# Altium PCB Boost Convertor V1 PCB.PcbDoc
Units mm, origin at the board's own origin, x right, y up, seen from the top; angles counter-clockwise.
Board outline 33.1 x 32.2 mm, 2 copper layers (Top Layer, Bottom Layer); 10 components, 7 nets, 26 pads, 0 vias.
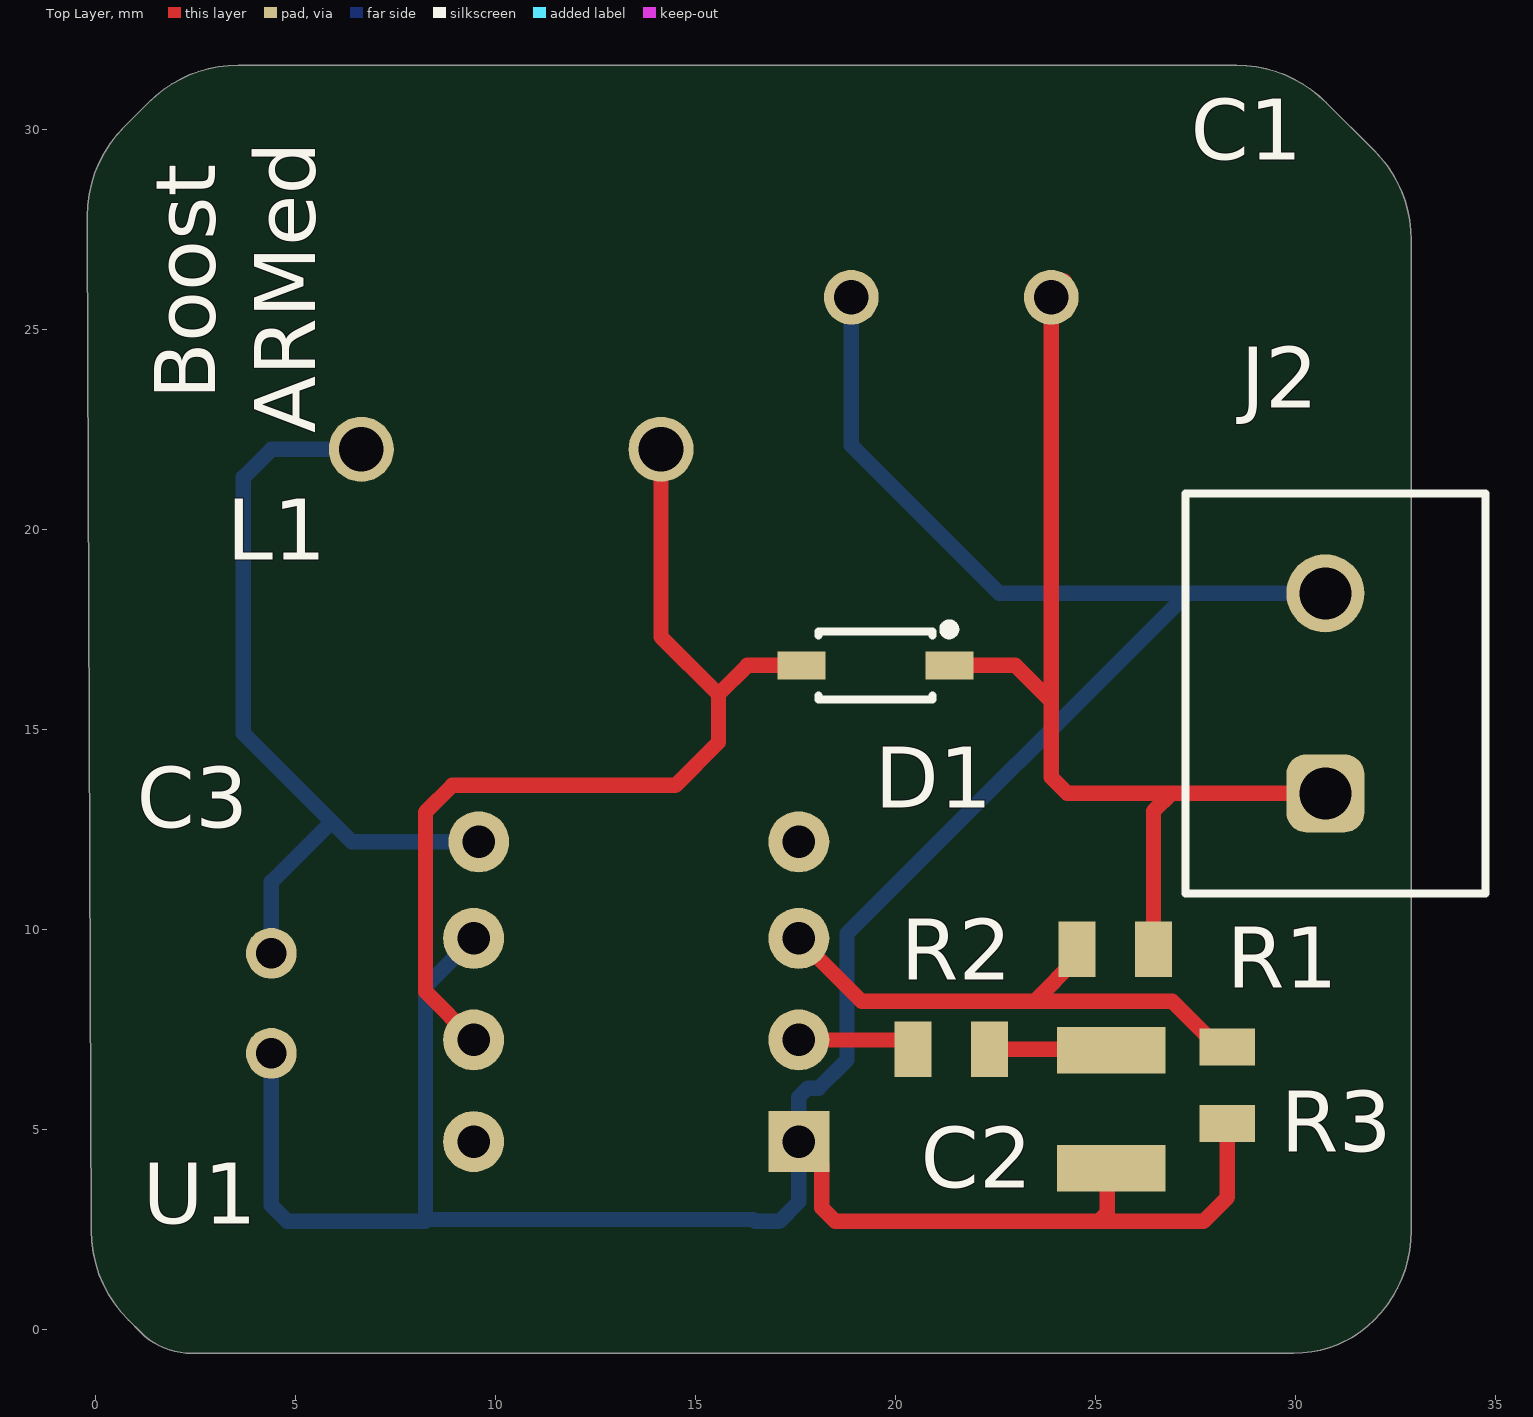
[diagram p0: Top Layer view]
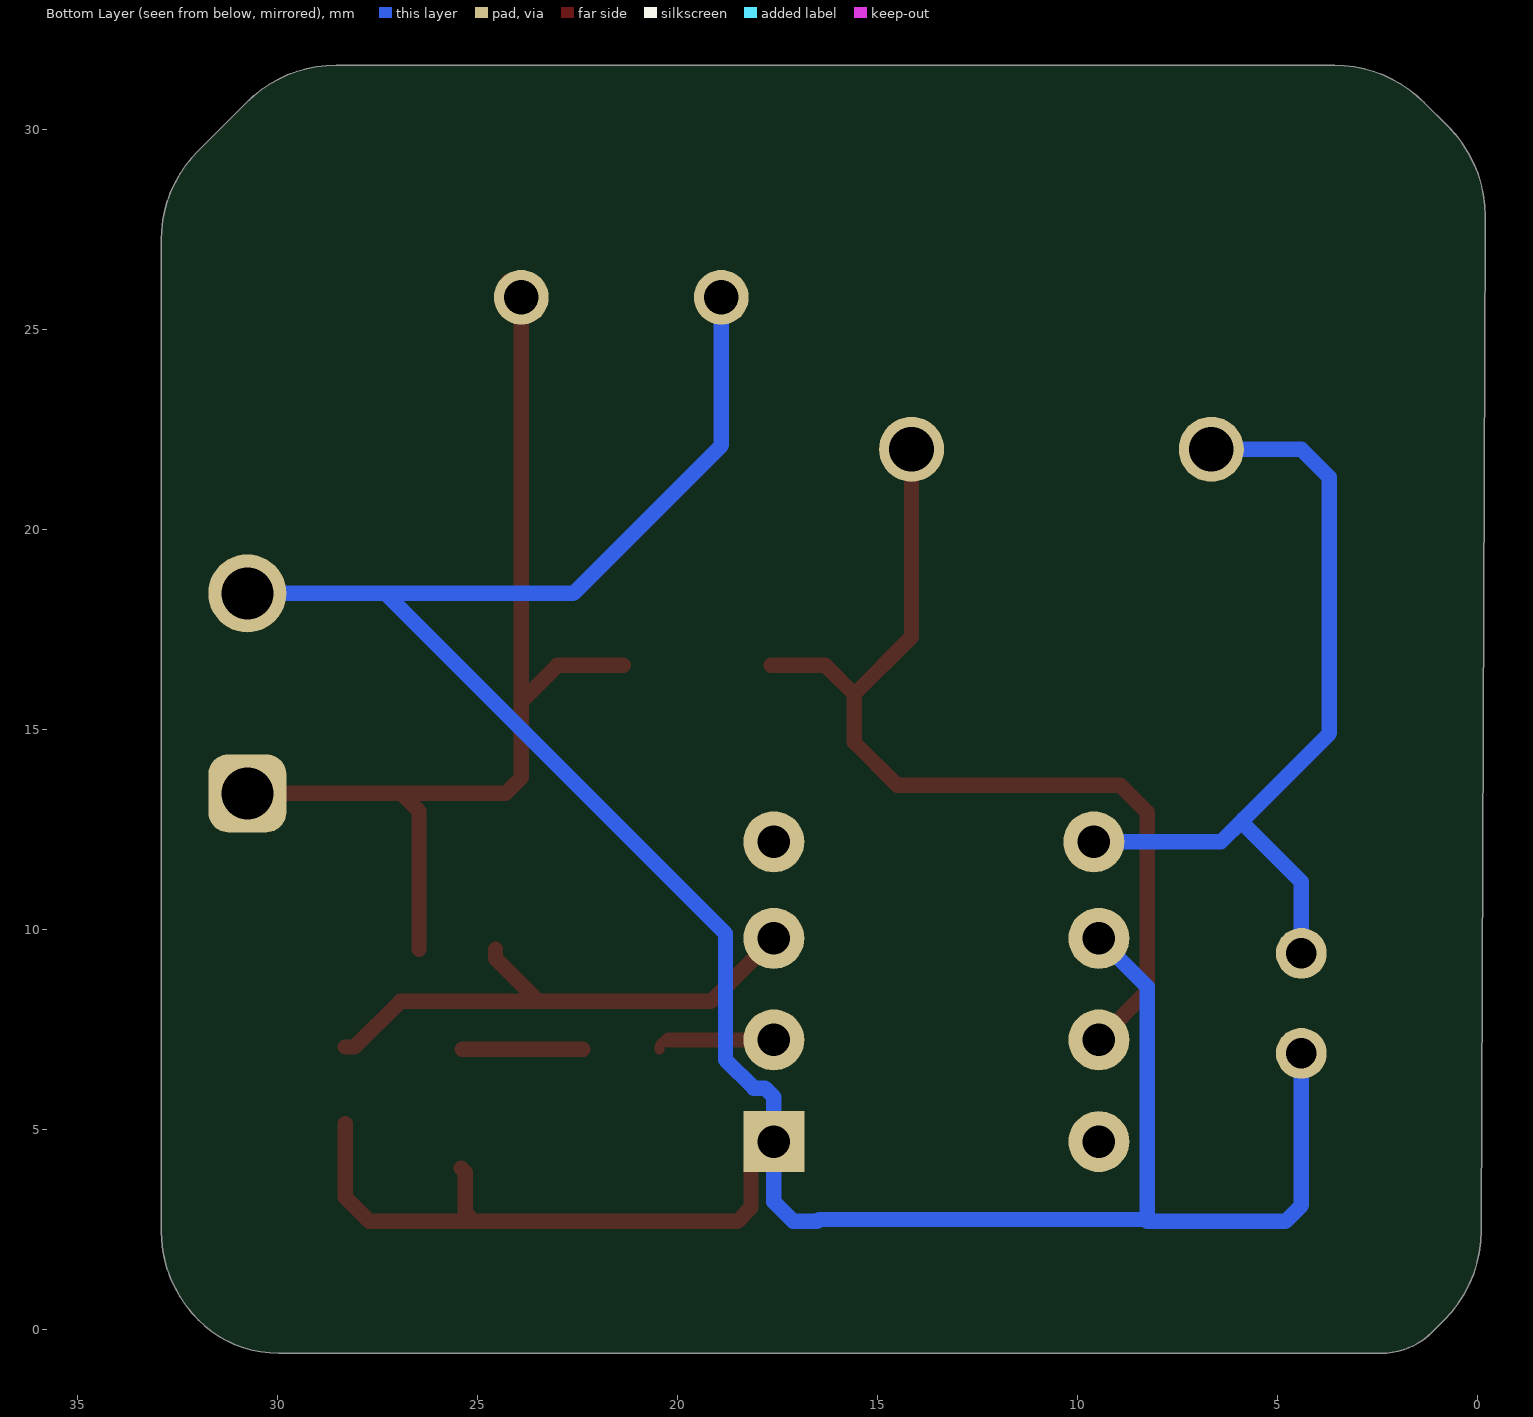
[diagram p1: Bottom Layer view, seen from below]
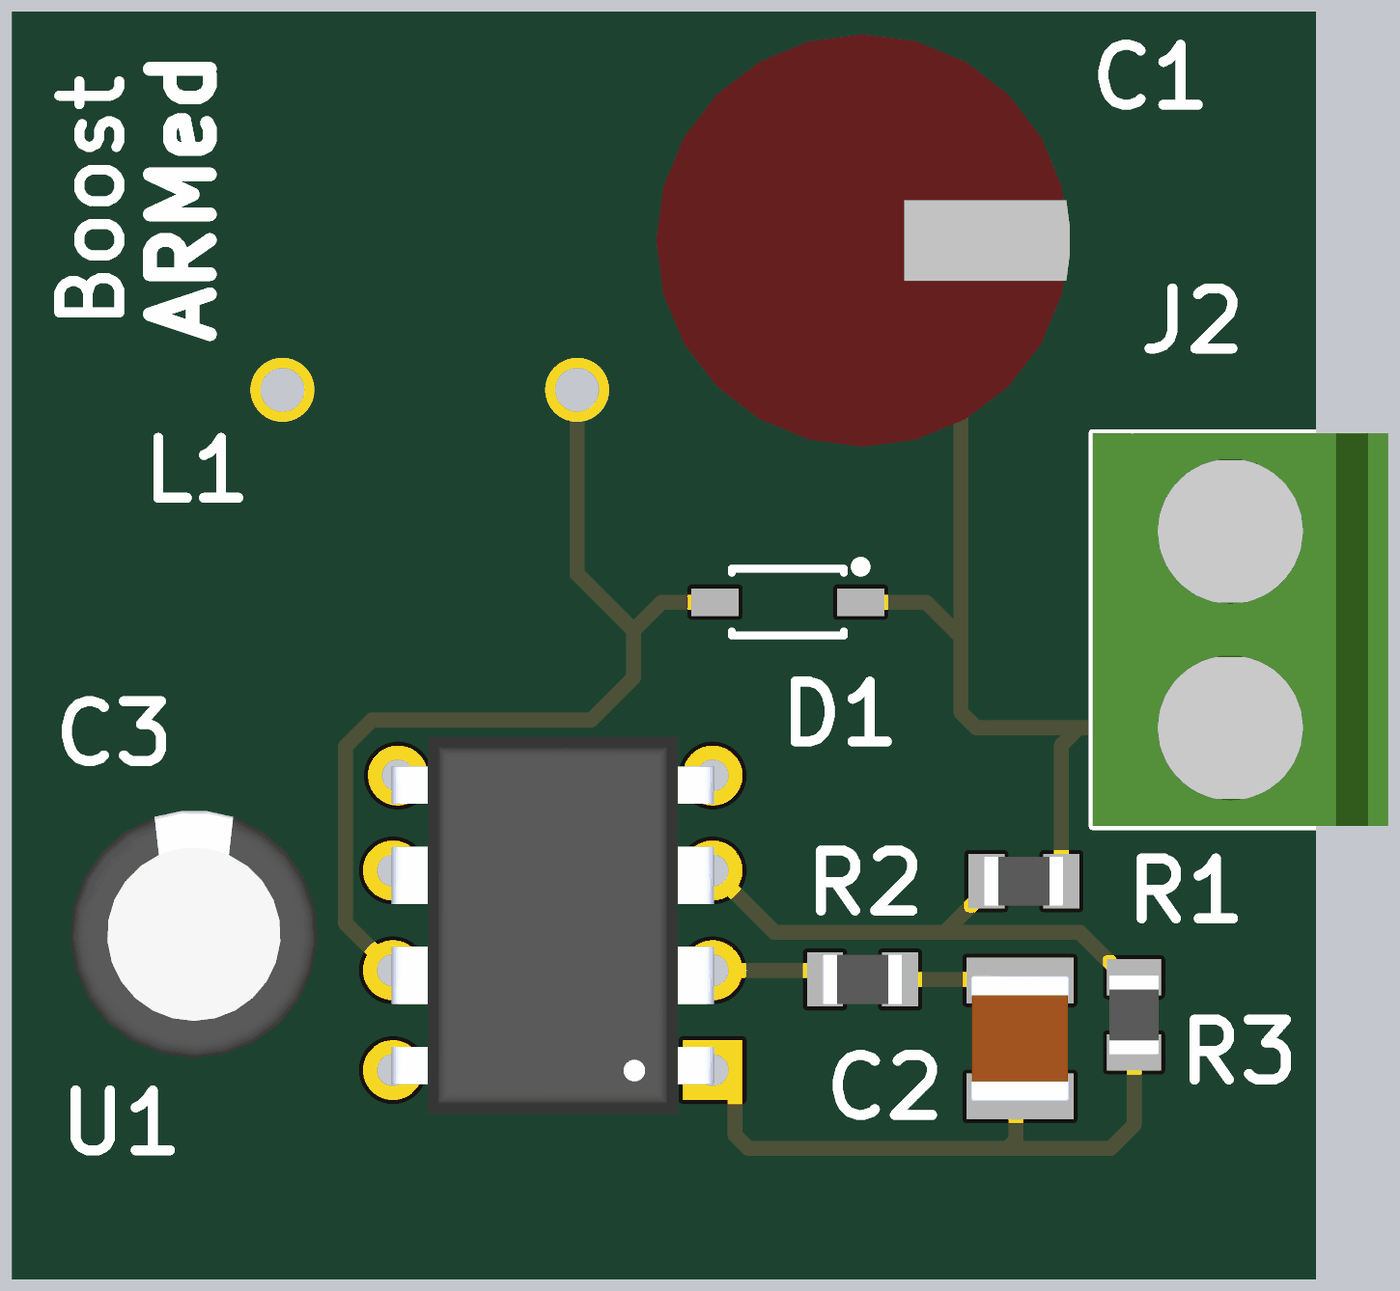
[diagram p2: 3D render of the assembled board from above, using the file's embedded part models]

## Layer stack, top to bottom
Top Solder: solder mask 0.0102, Solder Resist, Dk 3.5
Top Layer: signal copper 0.0356
Dielectric 1: dielectric 0.32, FR-4, Dk 4.8
Bottom Layer: signal copper 0.0356
Bottom Solder: solder mask 0.0102, Solder Resist, Dk 3.5

## Board outline
-0.1,2.47 ccw(c3.066,2.47) 0.827,0.231 1.134,-0.076 ccw(c2.4,1.19) 2.4,-0.6 29.966,-0.6 ccw(c29.966,2.238) 31.973,0.231 ccw(c29.734,2.47) 32.9,2.47 32.9,27.23 ccw(c29.734,27.23) 31.973,29.469 30.769,30.673 ccw(c28.53,28.434) 28.53,31.6 3.57,31.6 ccw(c3.57,28.434) 1.331,30.673 0.727,30.069 ccw(c2.966,27.83) -0.2,27.83 -0.2,27.5 -0.2,27.488

## Design rules (kind name [scope] priority, off if disabled: settings)
Clearance [All] p1: gap=0.254 ignorepadtopadclearanceinfootprint=FALSE
PolygonConnect [All] p1: connectstyle=Relief reliefconductorwidth=0.254 reliefentries=4 polygonreliefangle="90 Angle" airgapwidth=0.254
RoutingVias [All] p1: holewidth=0.711 width=1.27 viastyle="Through Hole" minholewidth=0.711 minwidth=1.27 maxholewidth=0.711 maxwidth=1.27
SolderMaskExpansion [All] p1: expansion=0.102 istentingtop=FALSE
SupplyNets "Schematic Supply Nets_2" [InNet('+5V')] p1: voltage=0.000
SupplyNets "Schematic Supply Nets_1" [InNet('GND')] p2: voltage=0.000
SupplyNets "Schematic Supply Nets" [InNet('+12V')] p3: voltage=0.000
Width [All] p1: maxlimit=0.381 minlimit=0.254 preferedwidth=0.254 minimp=50.000000 maximp=50.000000 favimp=50.000000
30 further rules are at their usual default settings.

## Components (designator, comment, footprint, x,y, rotation, side; value= is the part's Value field where it differs from the comment)
C1 "16ZLH1000MEFC10X16" 25PX1000MEFCT810X16 21.44,25.8 r0 top value=1000uF
C2 "CL10B105KA8NNNC" C1210C105K5RACTU 25.4,5.5 r270 top value=1uF
C3 "35ZLH100MEFC6.3X11" 35ZLH100MEFC6.3X11 4.4,8.17 r90 top value=100uF
D1 "BAT46W-7-F" DIOD-SOD-123-2_V 19.5,16.6 r0 top
J2 "691137710002" 691137710002 31,15.9 r90 top (schematic designator J?)
L1 "CTX50-1-52-R" CTX50-1-52-R 10.587,22.127 r0 top value=50uH
R1 "RC0805FR-0710K7L" RC0805FR-0710K7L 25.5,9.5 r0 top value=10.7K
R2 "#NAME?" RC0805FR-071KL 21.4,7 r0 top value=1kR
R3 "RC0805FR-071K24L" RC0805FR-071K24L 28.3,6.1 r270 top value=1.24K
U1 "LT1172CN8#PBF" LT1172CN8#PBF-ND 13.65,8.25 r180 top

## Footprints (in the part's own frame and the unit in brackets; to place one, negate y for a bottom-side part, rotate by r counter-clockwise, add the part's x,y. Pads: shape width x height; smd on the part's side, far side on the other; paste and mask are expansions set on the pad)
25PX1000MEFCT810X16 [mil] "Electrolytic Capacitor 1000uF"
  round 54 / inner round 60 / far side round 54 hole 34 paste-99999 mask+0: 1(-100,0) 2(96.85,0)
  body extent -208,-206 206,206, height 690
35ZLH100MEFC6.3X11 [mil] "Electrolytic Capacitor 100uF"
  round 50 / inner round 60 / far side round 50 hole 30 paste-99999 mask+0: 1(-50,0) 2(48.43,0)
  body extent -125,-124 123,124, height 492
691137710002 [mm] "Horizontal Cable Entry with Pressure Clamp, pitch 5mm, 02p"
  rrect50% 1.95x1.95 hole 1.3: 1(-2.5,0.25)
  round 1.95 hole 1.3: 2(2.5,0.25)
  silkscreen extent -5,-3.75 5,3.75, body extent -5,-3.75 5,3.75, height 11.6
C1210C105K5RACTU [mm] "Ceramic Capacitor 1uF"
  rect 1.16x2.72 smd: 1(-1.475,0) 2(1.475,0)
  body extent -1.6,-1.25 1.6,1.25, height 1.45
CTX50-1-52-R [mil] "Inductor 50uH"
  round 64 / inner round 60 / far side round 64 hole 44 paste-99999 mask+0: 1(-155,-5) 2(140,-5)
DIOD-SOD-123-2_V [mm] "SOD-123, 2-Leads, Body 2.85x1.7mm (max), Pitch 3.7mm"
  rect 1.2x0.7 smd: 1(-1.85,0) 2(1.85,0)
  silkscreen extent -1.43,-0.85 1.97,1.02, body extent -1.42,-0.85 1.43,0.85, height 1.45
LT1172CN8#PBF-ND [mil] "ICU"
  rect 60x60 / inner round 60 / far side rect 60x60 hole 32: 1(-155,140)
  round 60 hole 32: 2(-155,40) 3(-155,-60) 4(-155,-155) 5(160,-155) 6(165,-60) 7(165,40) 8(165,140)
  body extent -156,-194 166,184, height 200
RC0805FR-071K24L [mm] "1.24Kohm Resistor"
  rect 0.92x1.38 smd: 1(-0.955,0) 2(0.955,0)
  body extent -1,-0.63 1,0.63, height 0.6
RC0805FR-071KL [mm] "1Kohm resistor"
  rect 0.92x1.38 smd: 1(-0.955,0) 2(0.955,0)
  body extent -1,-0.63 1,0.63, height 0.6
RC0805FR-0710K7L [mm] "Resistor 10.7 Kohm - 0805"
  rect 0.92x1.38 smd: 1(-0.955,0) 2(0.955,0)
  body extent -1,-0.63 1,0.63, height 0.6

## Part data
C1: "Aluminum Electrolytic Capacitor, Polarized, Aluminum (wet), 16V, 20% +Tol, 20% -Tol, 1000uF, Through Hole Mount", Capacitor Type=Aluminium, Leakage Current=160uA, Manufacturer=Rubycon, Manufacturer Series=ZLH, Max Operating Temperature=105°C, Min Operating Temperature=-40°C, Package Shape=Cylindrical, Package Style=RadialMeter, Rated DC Voltage (URdc)=16V, Ripple Current=1.056A, Supplier Part Number=1189-1147-ND, Tolerance  (fill in as +-)=20%, Category="Aluminum Electrolytic Capacitors", ComponentLink1Description=https://datasheet.ciiva.com:443/pdfs/VipMasterIC/IC/RUBY/RUBYS01453/RUBYS01453-1.pdf?src-supplier=IHS+Markit, ComponentLink1URL=https://datasheet.ciiva.com:443/pdfs/VipMasterIC/IC/RUBY/RUBYS01453/RUBYS01453-1.pdf?src-supplier=IHS+Markit, ComponentLink2Description=https://datasheet.ciiva.com/6300/e-zlh-6300460.pdf?src-supplier=Digikey, ComponentLink2URL=https://datasheet.ciiva.com/6300/e-zlh-6300460.pdf?src-supplier=Digikey, ComponentLink3Description=https://datasheet.ciiva.com/11692/e-zlh-11692166.pdf?src-supplier=Avnet, ComponentLink3URL=https://datasheet.ciiva.com/11692/e-zlh-11692166.pdf?src-supplier=Avnet, ComponentLink4Description=https://datasheet.ciiva.com/16313/e-zlh-16313390.pdf?src-supplier=Future+Electronics, ComponentLink4URL=https://datasheet.ciiva.com/16313/e-zlh-16313390.pdf?src-supplier=Future+Electronics, ComponentLink5Description=https://datasheet.ciiva.com/22732/1910927-22732477.pdf?src-supplier=Element14, ComponentLink5URL=https://datasheet.ciiva.com/22732/1910927-22732477.pdf?src-supplier=Element14, Diameter=10mm, Dielectric Material=Aluminium, Length=16mm, Manufacturer Part Number=16ZLH1000MEFC10X16, Mounting Technology="Through Hole", Packaging=Bulk, Pins=2, Polarity=Polarized, Pricing="1=0.61, 10=0.377, 50=0.2812, 100=0.2505, 500=0.19778, 1000=0.18113, 3000=0.16029, 5000=0.1525 (USD)", Reach SVHC Compliant=Yes, RoHS=Yes, RoHS Compliant=Yes, Stock=32532, Supplier=Digikey, Tan Delta=0.16, Terminal Pitch=5mm, Termination=Wire, Tolerance (fill in as +-)=20%
C2: "Ceramic Capacitor 1uF", Capacitor Type=Aluminium, Manufacturer=KEMET, Manufacturer Part Number=ESL105M100AC3AA, Supplier Part Number=399-15737-ND, ComponentLink1Description=https://datasheet.ciiva.com:443/pdfs/VipMasterIC/IC/KEME/KEME-S-A0008958449/KEME-S-A0008958449-1.pdf?src-supplier=IHS+Markit, ComponentLink1URL=https://datasheet.ciiva.com:443/pdfs/VipMasterIC/IC/KEME/KEME-S-A0008958449/KEME-S-A0008958449-1.pdf?src-supplier=IHS+Markit, ComponentLink2Description=https://api.kemet.com/component-edge/download/datasheet/ESL105M100AC3AA.pdf?src-supplier=Digikey, ComponentLink2URL=https://api.kemet.com/component-edge/download/datasheet/ESL105M100AC3AA.pdf?src-supplier=Digikey, ComponentLink3Description=https://datasheet.octopart.com/ESL105M100AC3AA-KEMET-datasheet-176335207.pdf?src-supplier=Newark, ComponentLink3URL=https://datasheet.octopart.com/ESL105M100AC3AA-KEMET-datasheet-176335207.pdf?src-supplier=Newark, Pins=2, Pricing="1=0.15, 10=0.095, 50=0.0708, 100=0.0633, 500=0.04972, 1000=0.04522, 2500=0.04024, 5000=0.03706 (USD)", Reach SVHC Compliant=Yes, RoHS=Yes, RoHS Compliant=Yes, Stock=14632, Supplier=Digikey, Supplier 1=Avnet, Supplier Part Number 1=CL10B105KA8NNNC
C3: library part a00bbbee19879c290e62620ae7e47b1, "CAP ALUM 100UF 20% 35V RADIAL", Capacitance=100uF, Case/Package=Radial, Dielectric Material=Aluminium, Leakage Current=3uA, Max Operating Temperature=105°C, Min Operating Temperature=-40°C, Package Quantity=2000, Ripple Current=540mA, Tolerance=20%, Voltage=35V, Construction=RADIAL, Diameter=6.3mm, Height=11mm, Height - Seated (Max)=0.492inch, Impedance=94mR, Lead Diameter=0.5mm, Lead Pitch=2.5mm, Life (Hours)=6000Hour, Mount="Through Hole", Number of Pins=2, Packaging=Bulk, Radiation Hardening=No, REACH SVHC="No SVHC", Ripple Current (AC)=540mA, RoHS Compliant=Yes, Series=ZLH, Termination=Radial, Voltage Rating=35V, Voltage Rating (DC)=35V
D1: library part CMP-0303-00004-1, "Surface Mount Schottky Barrier Diode, 100 V, -55 to 125 degC, 2-Pin SOD123, RoHS, Tape and Reel", Manufacturer="Diodes Inc", Operating Temperature="-55 to 125 degC", ComponentLink1Description="Manufacturer URL", ComponentLink1URL=http://www.diodes.com/, ComponentLink2Description=Datasheet, ComponentLink2URL=http://diodes.com/datasheets/ds30044.pdf, ComponentLink3Description="Package Specification", ComponentLink3URL=http://diodes.com/datasheets/ds30044.pdf, CT@1 V="12 pF Typ.", DatasheetVersion="Rev. 16-2", IR@1.5 V="0.3 uA Max.", Mounting Technology="Surface Mount", PackageDescription="2-Pin SMD, Body 2.7 x 1.55 mm, Height 1.45 mm", Packing="Tape and Reel", PartNumber=BAT46W-7-F, RoHS=TRUE, V(BR)R="100 V Min.", VF@10 mA="0.45 V Max."
J2: library part CMP-1502-03324-2, Current Rating=16A, Max Operating Temperature=120°C, Min Operating Temperature=-30°C, Voltage Rating=300V, Contact Material="Nickel, Tin", Height=11.6mm, Lead Pitch=5mm, NexarPartId=78871135, Number of Contacts=2, Number of Pins=2, Number of Rows=1, Packaging=Box, RoHS=Non-Compliant
L1: "General Purpose Inductor, 50uH, 1 Element, Iron-Core", DC Resistance (DCR)=71.5mR, Inductance-Nom (L)=50uH, Inductor Application="POWER INDUCTOR", Inductor Type="GENERAL PURPOSE INDUCTOR", Manufacturer="Eaton Cooper", Max Current Rating=2.6A, Max Operating Temperature=75°C, Min Operating Temperature=-40°C, Package Diameter=16.2mm, Package Length=9mm, Package Style=ToroidalMeter, Supplier Part Number=513-1108-ND, Category="Fixed Inductors", Channels=1, ComponentLink1Description=https://datasheet.ciiva.com:443/pdfs/VipMasterIC/IC/ETON/ETON-S-A0008259577/ETON-S-A0008259577-1.pdf?src-supplier=IHS+Markit, ComponentLink1URL=https://datasheet.ciiva.com:443/pdfs/VipMasterIC/IC/ETON/ETON-S-A0008259577/ETON-S-A0008259577-1.pdf?src-supplier=IHS+Markit, ComponentLink2Description=https://datasheet.ciiva.com/8005/705007-8005134.pdf?src-supplier=Element14, ComponentLink2URL=https://datasheet.ciiva.com/8005/705007-8005134.pdf?src-supplier=Element14, ComponentLink3Description=https://datasheet.ciiva.com/16430/bus-elx-ds-pm4304-lpci-series-16430805.pdf?src-supplier=Future+Electronics, ComponentLink3URL=https://datasheet.ciiva.com/16430/bus-elx-ds-pm4304-lpci-series-16430805.pdf?src-supplier=Future+Electronics, ComponentLink4Description=https://datasheet.ciiva.com/30168/4935b080188143dbb73de2176f2c5e73-30168168.pdf?src-supplier=Onlinecomponents.com, ComponentLink4URL=https://datasheet.ciiva.com/30168/4935b080188143dbb73de2176f2c5e73-30168168.pdf?src-supplier=Onlinecomponents.com, Construction="Vertical Mount", Core Material=Ferrite, Lead Diameter=0.58mm, Lead Length=10mm, Lead Pitch=7.5mm, Manufacturer Part Number=CTX50-1-52-R, Packaging=Bulk, Pins=2, Pricing="1=2.67, 10=2.196, 25=2.0312, 50=1.915, 100=1.8057, 300=1.6451, 600=1.55137, 1200=1.46311, 2700=1.36639 (USD)", Reach SVHC Compliant=Yes, RoHS=Yes, RoHS Compliant=Yes, Shape/Size Description="CYLINDRICAL PACKAGE", Shielding=Unshielded, Stock=1049, Supplier=Digikey, Surface Mount=No, Terminal Placement=Radial, Termination=Wire
R1: "Fixed Resistor, Metal Film, 0.25W, 10700ohm, 250V, 1% +/-Tol, -100,100ppm/Cel", Manufacturer=Yageo, Manufacturer Part Number=MFR-25FBF52-10K7, Supplier Part Number=10.7KXBK-ND, Supplier Part Number 1=311-10.7KCRCT-ND, Category="Through-Hole Resistors", ComponentLink1Description=https://datasheet.ciiva.com:443/pdfs/VipMasterIC/IC/YAGO/YAGO-S-A0009358480/YAGO-S-A0009358480-1.pdf?src-supplier=IHS+Markit, ComponentLink1URL=https://datasheet.ciiva.com:443/pdfs/VipMasterIC/IC/YAGO/YAGO-S-A0009358480/YAGO-S-A0009358480-1.pdf?src-supplier=IHS+Markit, ComponentLink2Description=https://datasheet.ciiva.com/25645/yageolr-mfr-2013-25645816.pdf?src-supplier=Digikey, ComponentLink2URL=https://datasheet.ciiva.com/25645/yageolr-mfr-2013-25645816.pdf?src-supplier=Digikey, Pricing="1=0.1, 10=0.039, 25=0.0328, 50=0.0286, 100=0.0251, 250=0.02128, 500=0.0189, 1000=0.01685, 5000=0.01321 (USD)", RoHS=Yes, Stock=6622, Supplier=Digikey, Supplier 1=Digikey
R2: library part RC0805FR-071KL, "Fixed Resistor, Carbon Film, 0.25W, 1000ohm, 350V, 5% +/-Tol, -400,0ppm/Cel, Through Hole Mount", Manufacturer="Stackpole Electronics", Manufacturer Part Number=CF14JT1K00, Max Operating Temperature=155°C, Min Operating Temperature=-55°C, Package Length=6mm, Package Shape=Tubular, Package Style=AXIAL, Power=250mW, Rated Temperature=70°C, Resistor Type="FIXED RESISTOR", Supplier Part Number=CF14JT1K00CT-ND, Supplier Part Number 1=311-1.00KCRCT-ND, Temperature Coefficient (ppm/Cel)=400, Tolerance=5%, Working Voltage=350V, Category="Through-Hole Resistors", ComponentLink1Description=https://datasheet.ciiva.com:443/pdfs/VipMasterIC/IC/SEIE/SEIE-S-A0009883960/SEIE-S-A0009883960-1.pdf?src-supplier=IHS+Markit, ComponentLink1URL=https://datasheet.ciiva.com:443/pdfs/VipMasterIC/IC/SEIE/SEIE-S-A0009883960/SEIE-S-A0009883960-1.pdf?src-supplier=IHS+Markit, ComponentLink2Description=https://www.seielect.com/catalog/SEI-Packaging.pdf?src-supplier=Digikey, ComponentLink2URL=https://www.seielect.com/catalog/SEI-Packaging.pdf?src-supplier=Digikey, ComponentLink3Description=https://www.seielect.com/Catalog/SEI-CF_CFM.pdf?src-supplier=Digikey, ComponentLink3URL=https://www.seielect.com/Catalog/SEI-CF_CFM.pdf?src-supplier=Digikey, ComponentLink4Description=https://www.verical.com/server-webapp/html/getDatasheet?partID=360403&src-supplier=Verical, ComponentLink4URL=https://www.verical.com/server-webapp/html/getDatasheet?partID=360403&src-supplier=Verical, ComponentLink5Description=https://www.seielect.com/catalog/SEI-CF_CFM.pdf?src-supplier=Avnet, ComponentLink5URL=https://www.seielect.com/catalog/SEI-CF_CFM.pdf?src-supplier=Avnet, ComponentLink6Description=http://components.arrow.com/part/dataview/27620077S9848643N1174?src-supplier=Arrow+Electronics, ComponentLink6URL=http://components.arrow.com/part/dataview/27620077S9848643N1174?src-supplier=Arrow+Electronics, ComponentLink7Description=https://datasheet.octopart.com/CF14JT1K00-Stackpole-Electronics-datasheet-8360004.pdf?src-supplier=Future+Electronics, ComponentLink7URL=https://datasheet.octopart.com/CF14JT1K00-Stackpole-Electronics-datasheet-8360004.pdf?src-supplier=Future+Electronics, ComponentLink8Description=http://www.seielect.com/Catalog/SEI-CF_CFM.pdf?src-supplier=Future+Electronics, ComponentLink8URL=http://www.seielect.com/Catalog/SEI-CF_CFM.pdf?src-supplier=Future+Electronics, ComponentLink9Description=https://datasheet.octopart.com/CF14JT1K00-Stackpole-Electronics-datasheet-32780772.pdf?src-supplier=Electro+Sonic, ComponentLink9URL=https://datasheet.octopart.com/CF14JT1K00-Stackpole-Electronics-datasheet-32780772.pdf?src-supplier=Electro+Sonic, ComponentLink10Description=https://datasheet.octopart.com/CF14JT1K00-Stackpole-Electronics-datasheet-32780772.pdf?src-supplier=Master+Electronics, ComponentLink10URL=https://datasheet.octopart.com/CF14JT1K00-Stackpole-Electronics-datasheet-32780772.pdf?src-supplier=Master+Electronics, Construction=Tubular, JESD-609 Code=e3, Lead Diameter=0.55mm, Lead Length=28mm, Mounting Technology="Through Hole", Packaging="Tape and Reel", Pins=2, Pricing="1=0.1, 10=0.026, 25=0.022, 50=0.0192, 100=0.0169, 250=0.01424, 500=0.0126, 1000=0.0112 (USD)", Reach SVHC Compliant=Yes, RoHS=Yes, RoHS Compliant=Yes, Stock=444805, Supplier=Digikey, Supplier 1=Digikey, Technology="CARBON FILM", Terminal Finish=Tin, Termination=Wire
R3: "Fixed Resistor, Metal Film, 0.25W, 1240ohm, 250V, 1% +/-Tol, -100,100ppm/Cel", Manufacturer=Yageo, Manufacturer Part Number=MFR-25FBF52-1K24, Supplier Part Number=1.24KXBK-ND, Supplier Part Number 1=311-1.24KCRCT-ND, Category="Through-Hole Resistors", ComponentLink1Description=https://datasheet.ciiva.com:443/pdfs/VipMasterIC/IC/YAGO/YAGO-S-A0009358480/YAGO-S-A0009358480-1.pdf?src-supplier=IHS+Markit, ComponentLink1URL=https://datasheet.ciiva.com:443/pdfs/VipMasterIC/IC/YAGO/YAGO-S-A0009358480/YAGO-S-A0009358480-1.pdf?src-supplier=IHS+Markit, ComponentLink2Description=https://datasheet.ciiva.com/25646/yageolr-mfr-2013-25646123.pdf?src-supplier=Digikey, ComponentLink2URL=https://datasheet.ciiva.com/25646/yageolr-mfr-2013-25646123.pdf?src-supplier=Digikey, Pricing="1=0.1, 10=0.039, 25=0.0328, 50=0.0286, 100=0.0251, 250=0.02128, 500=0.0189, 1000=0.01685, 5000=0.01321 (USD)", RoHS=Yes, Stock=9531, Supplier=Digikey, Supplier 1=Digikey
U1: library part LT-LT1172-X8-8, "100 kHz, 1.25 A, High Efficiency Switching Regulator, 8-pin DIP (N8-8), 0 to 100 degC, Pb-Free", Frequency Sync Range="120kHz - 160kHz", Manufacturer="Linear Technology", ComponentLink1Description="Manufacturer URL", ComponentLink1URL=http://www.linear.com/, ComponentLink2Description=Datasheet, ComponentLink2URL=http://cds.linear.com/docs/en/datasheet/117012fg.pdf, ComponentLink3Description="Package Specification", ComponentLink3URL=http://www.linear.com/docs/en/packaging/05081510_I_N8.pdf, DatasheetVersion="Rev. G", Mounting Technology="Through Hole", Number of Outputs=1, PackageDescription="8-Pin PDIP, Body 10.16 x 6.48 mm, Pitch 2.54 mm", PackageReference=N8-8, PackageVersion="Rev. I, 07/2011", PartNumber=LT1172CN8#PBF, RoHS=TRUE

## Nets (pads, with @x,y where several pads share a name; then routed paths per layer and width w, separated by ;. In a path a pad name is that pad's centre, name@x,y a point inside that pad or via, vN(x,y) a via of type N, cw(c..) or ccw(c..) an arc to the next point about the centre after c; other vN are vias at no path point)
+5V: C3.2 L1.1 U1.5 | length 20.9
  Bottom Layer w0.381: C3.2 4.4,11.187 5.85,12.637 5.85,12.75 ; L1.1@6.412,21.762 L1.1 4.4,22 3.7,21.3 3.7,14.9 5.85,12.75 ; U1.5 6.413,12.187 5.85,12.75
+12V: C1.2 D1.2 J2.1 R1.2 | length 26.3
  Top Layer w0.381: D1.2 23,16.6 23.9,15.7 ; C1.2 23.9,15.7 ; C1.2@23.96,26.2 C1.2@24.228,26.2 ; R1.2 26.455,12.955 26.9,13.4 ; J2.1 26.9,13.4 ; 23.9,15.7 23.9,13.8 24.3,13.4 26.9,13.4
FB: R1.1 R3.1 U1.3 | length 13.6
  Top Layer w0.381: U1.3 19.161,8.2 23.475,8.2 ; R1.1 24.545,9.27 23.475,8.2 ; R3.1 28.07,7.055 26.925,8.2 23.475,8.2
GND: C1.1 C2.2 C3.1 J2.2 R3.2 U1.1 U1.6 | length 77.1
  Top Layer w0.381: U1.1 18.159,4.123 18.159,3.042 18.5,2.7 25.077,2.7 ; C2.2 25.3,3.925 25.3,2.923 25.077,2.7 ; R3.2 28.3,3.3 27.7,2.7 25.077,2.7
  Bottom Layer w0.381: C3.1 4.4,3.1 4.8,2.7 ; 4.823,2.7 8.253,2.7 ; U1.6 8.253,8.568 8.253,2.748 16.452,2.748 16.5,2.7 17.1,2.7 17.587,3.187 17.587,5.804 17.81,6.028 18.087,6.028 18.794,6.734 18.794,9.894 27.3,18.4 ; C1.1 18.9,22.1 22.6,18.4 27.3,18.4 ; J2.2 27.3,18.4
NetC2_1: C2.1 R2.2 | length 3.1
  Top Layer w0.254: C2.1@25.375,7 C2.1
  Top Layer w0.381: R2.2 C2.1@25.375,7
Vc: R2.1 U1.2 | length 3
  Top Layer w0.254: R2.1@20.211,7.234 cw(c20.211,7) R2.1
  Top Layer w0.381: U1.2 R2.1@20.211,7.234
VSW: D1.1 L1.2 U1.7 | length 24.8
  Top Layer w0.381: U1.7 8.253,8.441 8.253,12.929 8.923,13.6 14.5,13.6 15.577,14.677 15.577,15.877 ; L1.2@14.343,21.8 L1.2 14.143,17.311 15.577,15.877 ; D1.1 16.3,16.6 15.577,15.877
pads on no net: U1.4 U1.8

## Silkscreen, mask and mechanical layers (free items; w line width, h text height)
Top Overlay:
  text "Boost" at 3,23.245 h1.52 r90
  text "ARMed" at 5.5,22.4 h1.52 r90